# Allegro board board4DF.brd
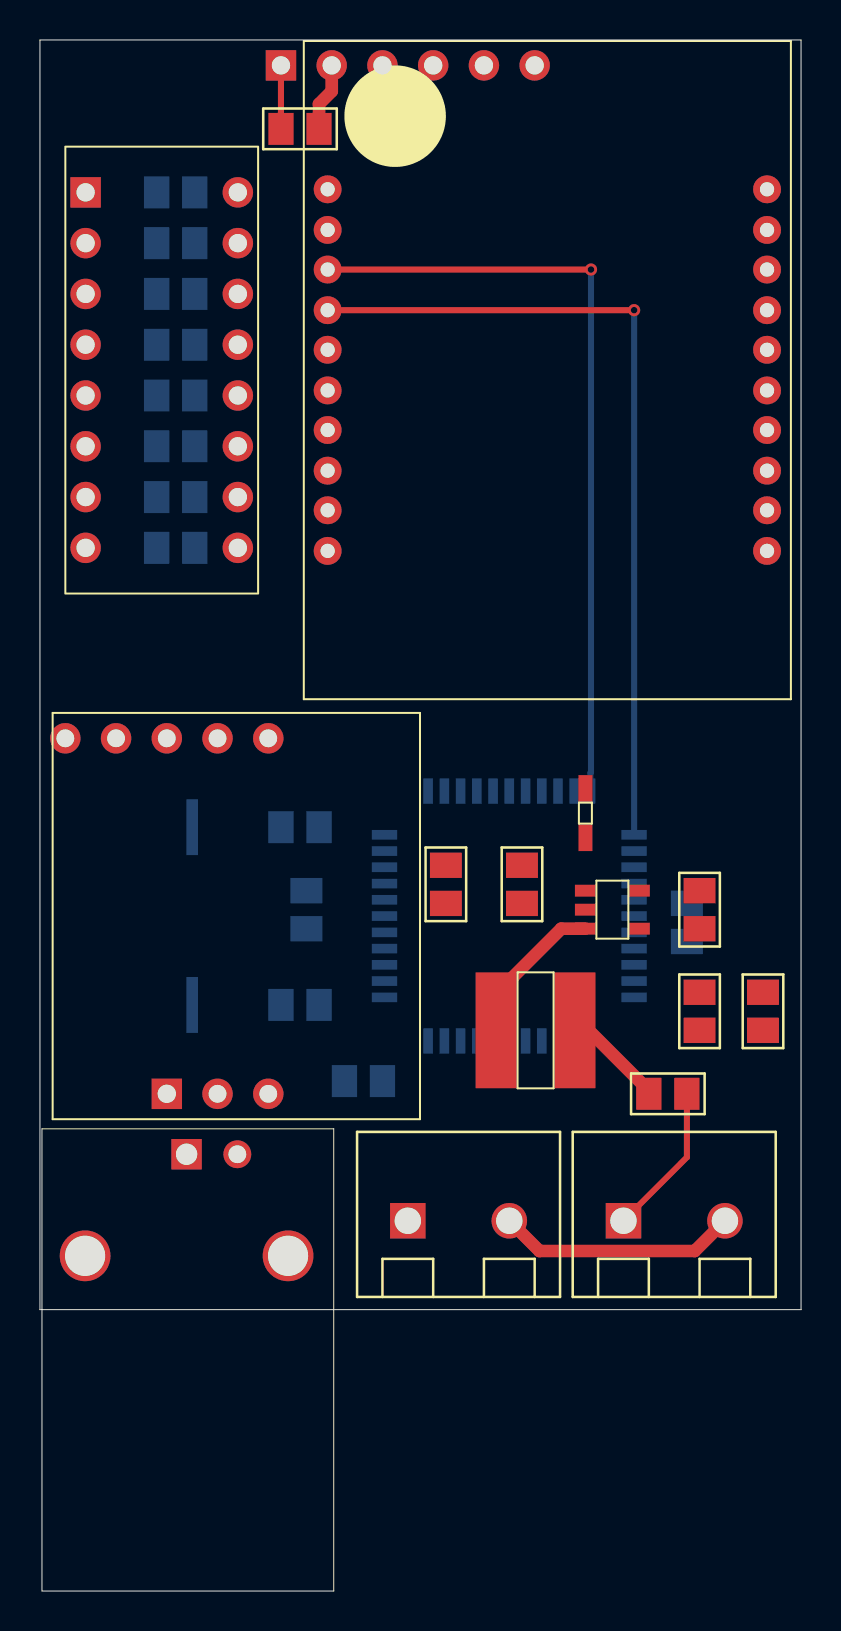
[diagram p0: board, top side]
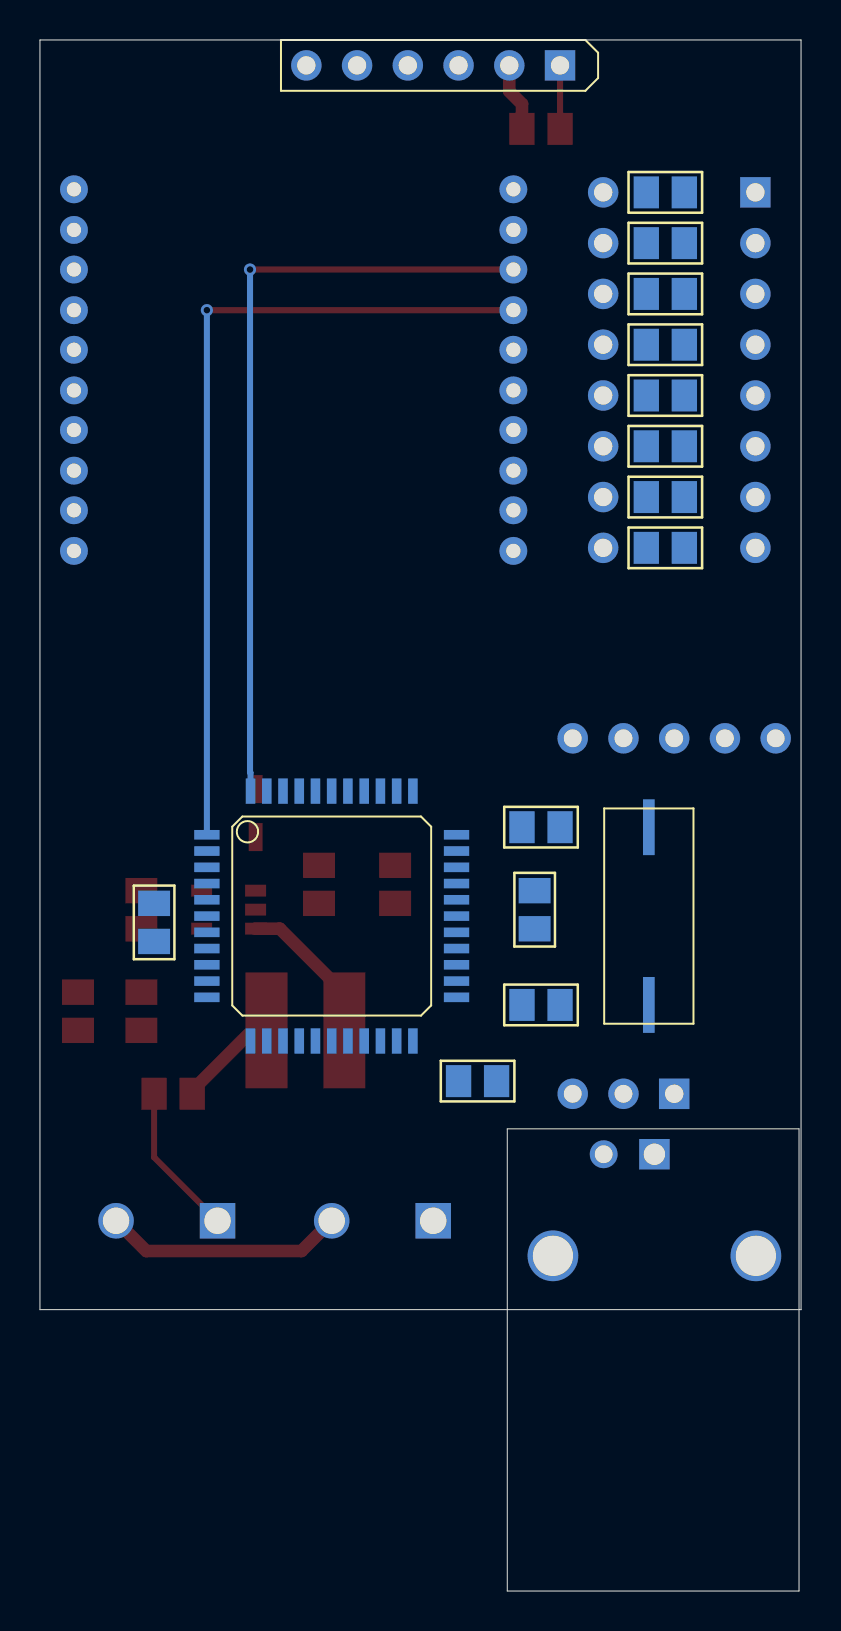
[diagram p1: board, bottom side, seen from below]

Outline 38.1 x 77.57 mm; copper layers: TOP, BOTTOM. Coordinates in mm from the lower left corner of the outline.
Outline path: 0,77.57 38.1,77.57 38.1,14.07 0,14.07 0,77.57

## Design rules (mm)
nets with their own width: min track width 0.635; nets 3.3V 4.2V(PILE) GND N83047

## Placement (name value [footprint] x y rotation side)
C1  10uF  [C_0805]  24.13 34.39 90 top
C2  100nF  [C_0805]  20.32 34.39 90 top
C3  22uF  [C_0805]  36.19 28.04 90 top
C4  27pF  [C_0805]  13.97 29.31 180 bottom
C5  27pF  [C_0805]  13.97 38.2 180 bottom
C6  10uF  [C_0805]  17.14 25.5 180 bottom
C7  0.1 uF  [C_0805]  13.34 33.12 90 bottom
C8  0.1 uF  [C_0805]  32.38 32.49 90 bottom
D1  Vz 6V  [DIODESOD323]  27.31 40.11 270 top
J1  HEADER 2  [CONNECTEUR_2_200]  18.41 18.52 0 top
J2  Convertion Board  [CONDUCTIVITY_SENSOR]  0.63 23.6 90 top
J3  BNC au capteur  [CONNECTEUR_BNC]  0.1 23.11 270 top
J4  Xbee  [XBEE]  25.4 61.06 0 top
J5  Connecteur PicKit  [SIP6]  12.06 76.3 270 bottom
J6  contact eau  [CONNECTEUR_2_200]  29.21 18.52 0 top
L1  10uH  [BOBINE10U100MH]  22.86 28.04 0 top
R1  61.9K  [R_0805]  33.02 35.03 270 top
R2  20K  [R_0805]  33.02 28.04 90 top
R3  4.7K  [R_0805]  13.97 73.13 180 top
R4  10K  [R_0805]  30.48 24.87 0 top
R5  10K  [R_0805]  5.84 69.95 0 bottom
R6  10K  [R_0805]  5.84 67.41 0 bottom
R7  10K  [R_0805]  5.84 64.87 0 bottom
R8  10K  [R_0805]  5.84 62.33 0 bottom
R9  10K  [R_0805]  5.84 59.79 0 bottom
R10  10K  [R_0805]  5.84 57.25 0 bottom
R11  10K  [R_0805]  5.84 54.71 0 bottom
R12  10K  [R_0805]  5.84 52.17 0 bottom
SW1  SW DIP-8  [DIPSWITCH]  2.29 69.95 0 top
U1  LM104/TO  [TPS560200]  27.31 35.03 0 top
U2  PIC18F47J13  [PQFP44]  23.5 33.76 180 bottom
Y1  4Mhz CRYSTAL  [CRYSTAL_SMD]  7.62 33.76 270 bottom

## Library data of the parts
C1-C3 = C
C4-C6 = CAPACITOR NON-POL
C7 C8 = CAP NP
D1 = DIODE ZENER
J1 J6 = HEADER 2
J2 = HEADER 3X2_3
J3 = BNC
J4 = HEADER 11X2_1
J5 = HEADER 6_0: User Part Number: ***
L1 = INDUCTOR
R1 R2 R4-R12 = R
R3 = RESISTOR
SW1 = SW DIP-8: User Part Number: ***
U1 = LM104/TO_3
U2 = PIC16C67_1: Tolerance: ***; User Part Number: ***
Y1 = CRYSTAL

## Footprints (pads in the part's own frame, mm; a bottom-side part is the same pattern mirrored in y, then rotated)
BOBINE10U100MH
  rect 2.1x5.8 smd: 1(0,0) 2(3.9,0)
C_0805
  rect 1.27x1.6 smd: 1(0,0) 2(1.905,0)
CONDUCTIVITY_SENSOR
  rect 1.524x1.524 hole 0.914: 1(1.27,-5.715)
  round 1.524 hole 0.889: 2(1.27,-8.255) 3(1.27,-10.795) 4(19.05,-10.795) 5(19.05,-8.255) 6(19.05,-5.715) 7(19.05,-3.175) 8(19.05,-0.635)
CONNECTEUR_2_200
  rect 1.778x1.778 hole 1.321: 1(0,0)
  round 1.778 hole 1.321: 2(5.08,0)
CONNECTEUR_BNC
  round 2.54 hole 2.007: (6.35,12.319) (6.35,2.159)
  rect 1.524x1.524 hole 1.067: 1(1.27,7.239)
  round 1.397 hole 0.889: 2(1.27,9.779)
CRYSTAL_SMD
  rect 2.794x0.584 smd: 1(-4.445,0) 2(4.445,0)
DIODESOD323
  rect 1.4x0.7 smd: 1(0,0) 2(2.4,0)
DIPSWITCH
  rect 1.524x1.524 hole 0.914: 1(0,0)
  round 1.524 hole 0.914: 2(0,-2.54) 3(0,-5.08) 4(0,-7.62) 5(0,-10.16) 6(0,-12.7) 7(0,-15.24) 8(0,-17.78) 9(7.62,-17.78) 10(7.62,-15.24) 11(7.62,-12.7) 12(7.62,-10.16) 13(7.62,-7.62) 14(7.62,-5.08) 15(7.62,-2.54) 16(7.62,0)
PQFP44
  rect 1.27x0.483 smd: 1(-6.248,4.064) 2(-6.248,3.251) 3(-6.248,2.438) 4(-6.248,1.626) 5(-6.248,0.813) 6(-6.248,0) 7(-6.248,-0.813) 8(-6.248,-1.626) 9(-6.248,-2.438) 10(-6.248,-3.251) 11(-6.248,-4.064) 23(6.248,-4.064) 24(6.248,-3.251) 25(6.248,-2.438) 26(6.248,-1.626) 27(6.248,-0.813) 28(6.248,0) 29(6.248,0.813) 30(6.248,1.626) 31(6.248,2.438) 32(6.248,3.251) 33(6.248,4.064)
  rect 0.483x1.27 smd: 12(-4.064,-6.248) 13(-3.251,-6.248) 14(-2.438,-6.248) 15(-1.626,-6.248) 16(-0.813,-6.248) 17(0,-6.248) 18(0.813,-6.248) 19(1.626,-6.248) 20(2.438,-6.248) 21(3.251,-6.248) 22(4.064,-6.248) 34(4.064,6.248) 35(3.251,6.248) 36(2.438,6.248) 37(1.626,6.248) 38(0.813,6.248) 39(0,6.248) 40(-0.813,6.248) 41(-1.626,6.248) 42(-2.438,6.248) 43(-3.251,6.248) 44(-4.064,6.248)
R_0805
  rect 1.27x1.6 smd: 1(0,0) 2(1.905,0)
SIP6
  rect 1.524x1.524 hole 0.914: 1(0,0)
  round 1.524 hole 0.914: 2(0,-2.54) 3(0,-5.08) 4(0,-7.62) 5(0,-10.16) 6(0,-12.7)
TPS560200
  rect 1.05x0.6 smd: 1(0,0) 2(0,-0.95) 3(0,-1.9) 4(2.7,-1.9) 5(2.7,0)
XBEE
  round 1.397 hole 0.711: 1(-10.998,9.042) 2(-10.998,7.01) 3(-10.998,5.029) 4(-10.998,2.997) 5(-10.998,1.016) 6(-10.998,-1.016) 7(-10.998,-2.997) 8(-10.998,-5.029) 9(-10.998,-7.01) 10(-10.998,-9.042) 11(10.998,-9.042) 12(10.998,-7.01) 13(10.998,-5.029) 14(10.998,-2.997) 15(10.998,-1.016) 16(10.998,1.016) 17(10.998,2.997) 18(10.998,5.029) 19(10.998,7.01) 20(10.998,9.042)

## Nets
3.3V: C3.2 C7.1 C8.1 J2.1 J4.2 J5.2 L1.2 R1.2 R3.1 R4.1 R5.2 R6.2 R7.2 R8.2 R9.2 R10.2 R11.2 R12.2 U2.7(VDD1) U2.22(RA3) U2.28(VDD2)
4.2V(PILE): C1.2 C2.2 D1.1(CATHODE) J1.1 U1.4(VIN)
GND: C1.1 C2.1 C3.1 C4.1 C5.1 C6.2 C7.2 C8.2 J1.2 J2.4(GND) J4.1 J4.10 J5.3 J6.2 R2.1 SW1.9(B8) SW1.10(B7) SW1.11(B6) SW1.12(B5) SW1.13(B4) SW1.14(B3) SW1.15(B2) SW1.16(B1) U1.2(GND) U2.6(VSS1) U2.21(RA2) U2.29(VSS2)
CAPTEURRX: J2.6 U2.14(RB4)
CAPTEURTX: J2.5 U2.15(RB5)
ENABLE POWER: U1.1(EN) U2.26(RE1)
RB2: J2.8 U2.10(RB2)
RB3: J2.7 U2.11(RB3)
XBEEDIN: J4.4 U2.1(RC7)
XBEEDOUT: J4.3 U2.44(RC6)
XBEERESET: J4.6 U2.36(RC2)
XBEESLEEP: J4.9 U2.25(RE0)
N45185: C6.1 U2.23(VDDCORE)
N45221: J5.5 U2.16(RB6)
N45265: J5.4 U2.17(RB7)
N45305: J5.1 R3.2 U2.18(M\C\L\R\)
N56544: R5.1 SW1.1(A1) U2.5(RD7)
N56546: R6.1 SW1.2(A2) U2.4(RD6)
N56548: R7.1 SW1.3(A3) U2.3(RD5)
N56550: R8.1 SW1.4(A4) U2.2(RD4)
N56552: R9.1 SW1.5(A5) U2.41(RD3)
N56554: R10.1 SW1.6(A6) U2.40(RD2)
N56556: R11.1 SW1.7(A7) U2.39(RD1/SDA2)
N56558: R12.1 SW1.8(A8) U2.38(RD0/SCL2)
N61373: J2.2 J3.1(CENTER)
N61405: J2.3 J3.2(SHIELD)
N78069: C4.2 U2.30(OSC1/RA7) Y1.2
N78169: C5.2 U2.31(OSC2/RA6) Y1.1
N80519: J6.1 R4.2 U2.9(RB1)
N81598: D1.2(ANODE) U2.27(RE2)
N82912: R1.1 R2.2 U1.5(VSENSE)
N83047: L1.1 U1.3(PH)

Pads without a net: J4 5 7 8 11 12 13 14 15 16 17 18 19 20; J5 6; U2 8 12 13 19 20 24 32 33 34 35 37 42 43

## Via types
v1: diameter 0.61, hole 0.33, TOP to BOTTOM, 2 vias

## Routing (per net, layer and track width the routed paths; a pad name or vN(x,y) marks a point on that pad's centre or on a via; arc(x,y) is an arc through that point)
3.3V: length 8.6
  TOP w0.635: R3.1 13.97,74.37 14.6,75.01 J5.2 ; L1.2 27.47,28.04 30.48,25.03 R4.1
GND: length 12
  TOP w0.635: J1.2 25.01,17.01 32.78,17.01 J6.2
XBEEDIN: length 41.6
  TOP w0.305: J4.4 v1(29.74,64.06)
  BOTTOM w0.305: v1(29.74,64.06) 29.74,37.82
XBEEDOUT: length 39.3
  TOP w0.305: J4.3 v1(27.58,66.09)
  BOTTOM w0.305: v1(27.58,66.09) 27.58,40.94 27.56,40.92 U2.44
N45305: length 3.2
  TOP w0.305: J5.1 R3.2
N80519: length 7.7
  TOP w0.305: R4.2 32.38,21.69 J6.1
N83047: length 7.6
  TOP w0.635: U1.3 26.09,33.13 22.86,29.89 L1.1
